# Altium PCB NeuroMother_A.PcbDoc (part 1 of 3)
Units mil, origin at the board's own origin, x right, y up, seen from the top; angles counter-clockwise.
Board outline 11995 x 18500 mil, 2 copper layers (Top Layer, Bottom Layer); 186 components, 92 nets, 510 pads, 3972 vias.
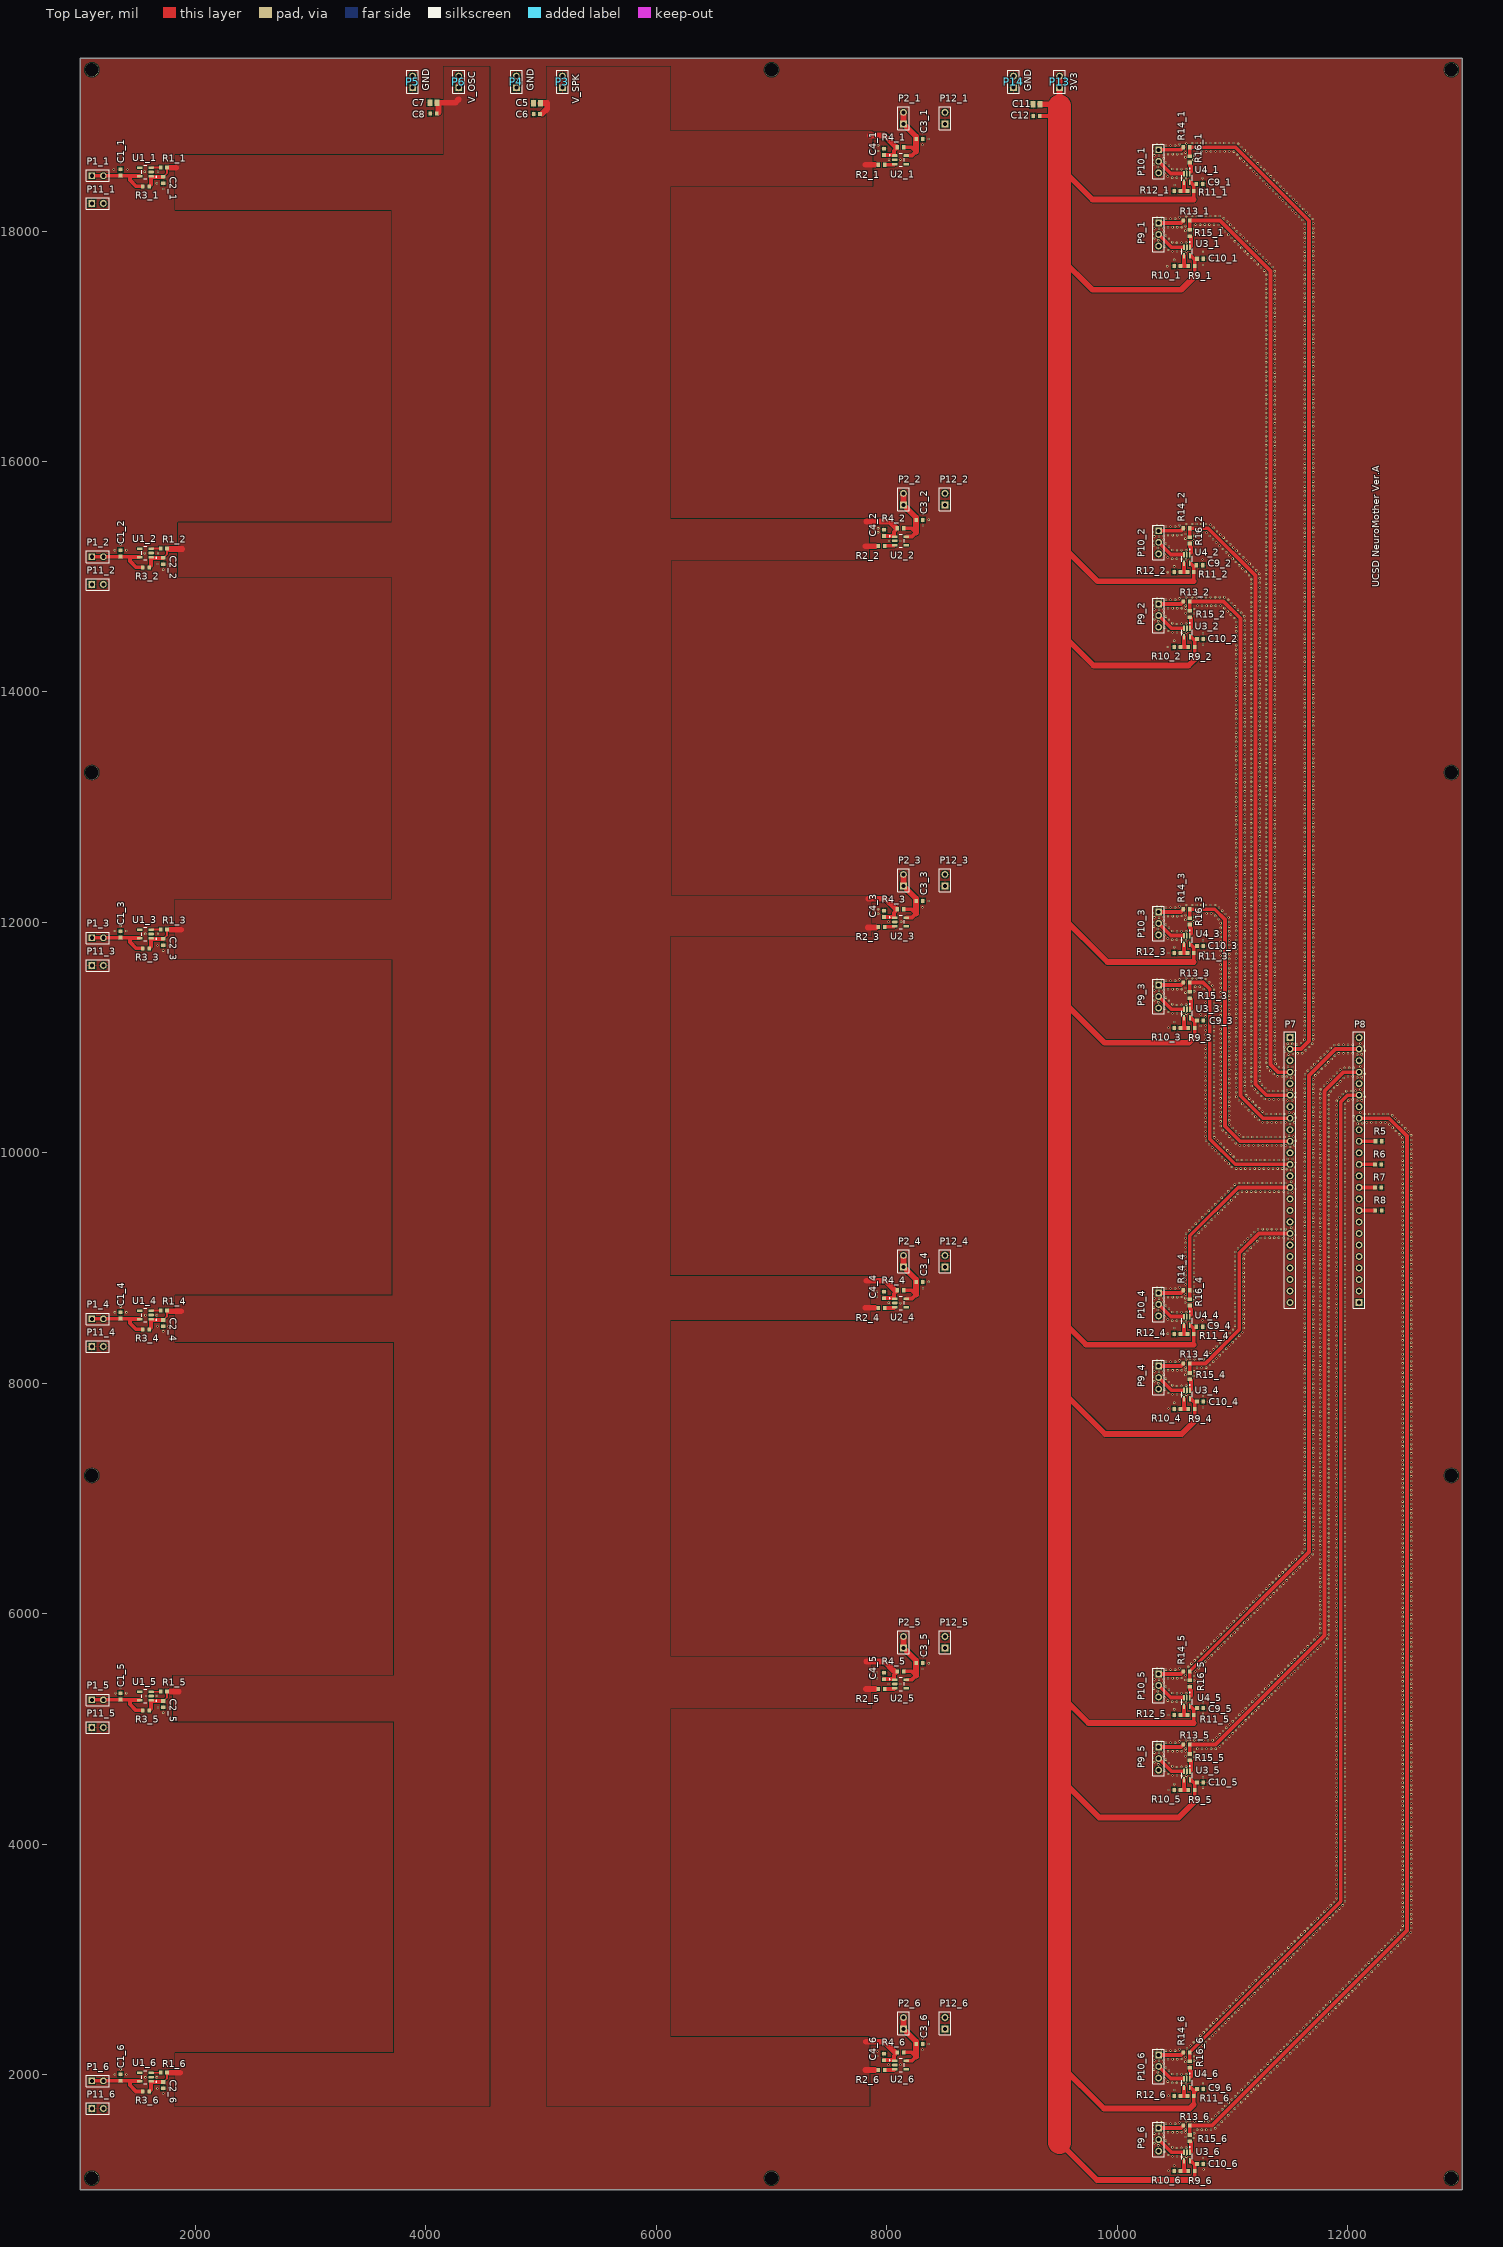
[diagram p0: Top Layer view]
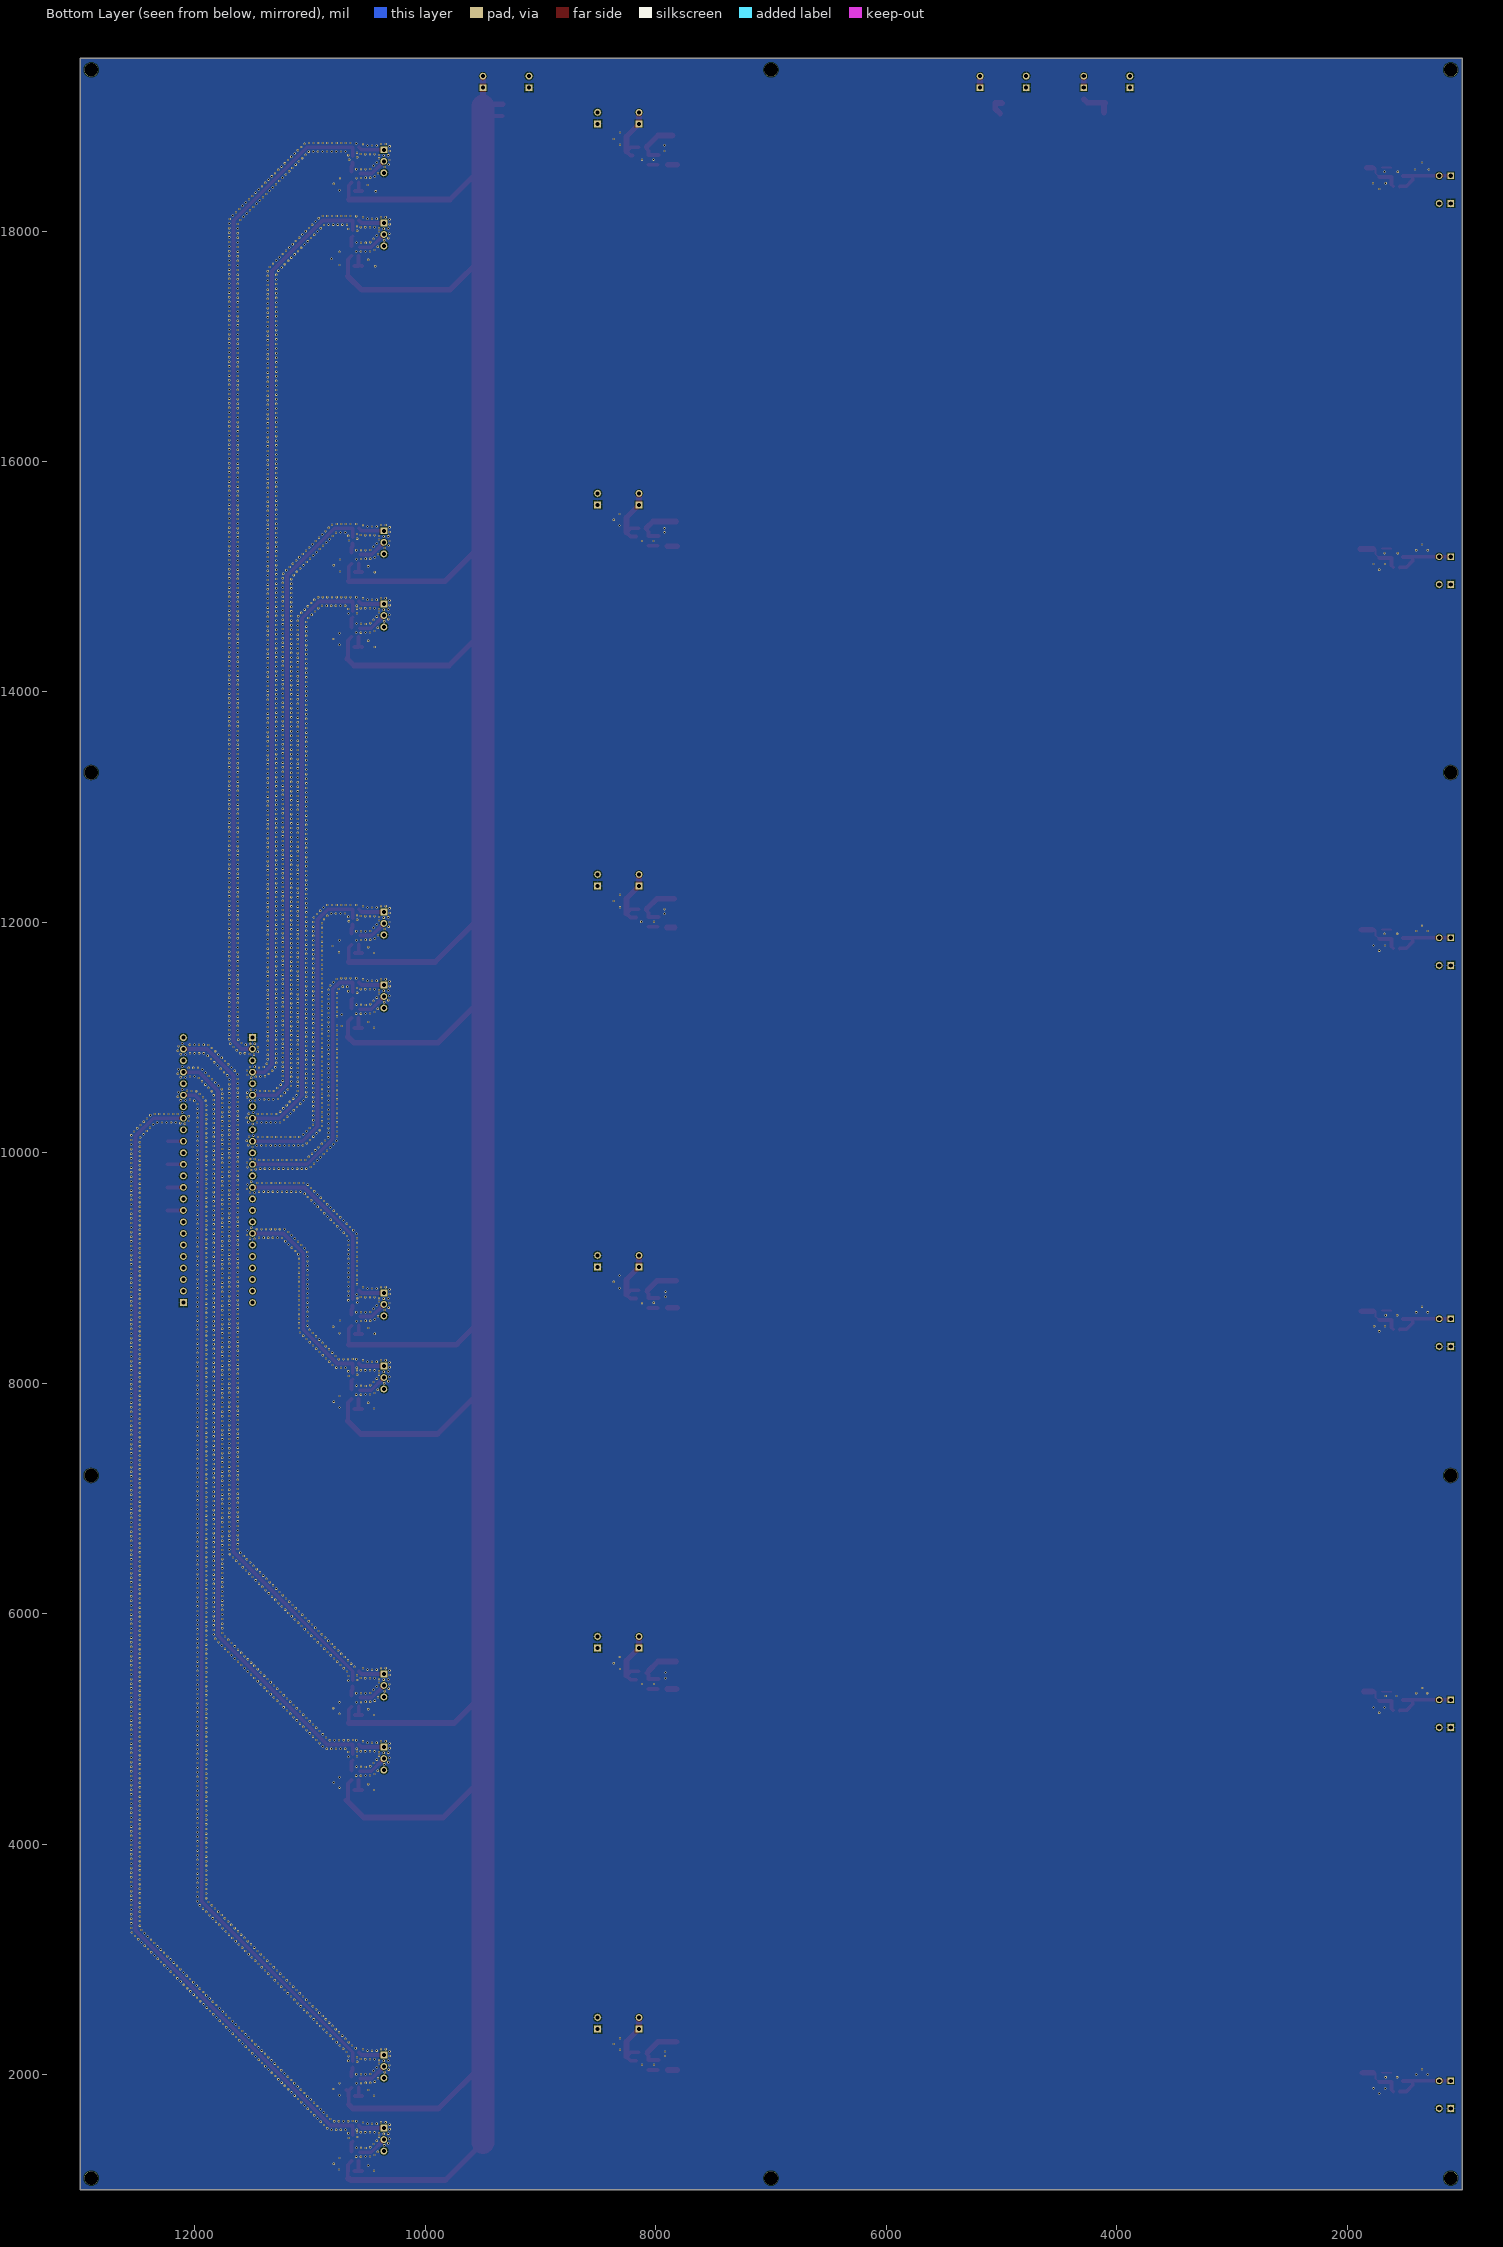
[diagram p1: Bottom Layer view, seen from below]

## Layer stack, top to bottom
Top Solder: solder mask 0.4, Solder Resist, Dk 3.5
Top Layer: signal copper 1.4
Dielectric 1: dielectric 12.6, FR-4, Dk 4.8
Bottom Layer: signal copper 1.4
Bottom Solder: solder mask 0.4, Solder Resist, Dk 3.5

## Board outline
1000,1000 12995,1000 12995,19500 1000,19500

## Design rules (kind name [scope] priority, off if disabled: settings)
BoardOutlineClearance [All] p1: gap=10 ignorepadtopadclearanceinfootprint=FALSE except(0: Arc-SplitContinuation Track-SplitContinuation SMDPad-SplitContinuation THPad-SplitContinuation Via-SplitContinuation Fill-SplitContinuation Poly-SplitContinuation Region-SplitContinuation Text-SplitContinuation)
Clearance [All] p1: gap=6 ignorepadtopadclearanceinfootprint=FALSE except(0: Arc-Hole Track-Hole SMDPad-Hole THPad-Hole Via-Hole Fill-Hole Poly-Hole Region-Hole Text-Hole)
HoleSize [All] p1: absolutevalues=TRUE maxlimit=150 minlimit=1 maxpercent=80.000 minpercent=20.000
MinimumSolderMaskSliver [All] p1: minsoldermaskwidth=4
PlaneConnect [All] p1: pad.planeconnectstyle=Relief pad.reliefexpansion=20 pad.reliefentries=4 pad.reliefconductorwidth=10 pad.reliefairgap=10 via.planeconnectstyle=Direct via.reliefexpansion=20 via.reliefentries=4 via.reliefconductorwidth=10 via.reliefairgap=10
PolygonConnect [All] p1: thpad.connectstyle=Relief thpad.reliefconductorwidth=10 thpad.reliefentries=4 thpad.polygonreliefangle="90 Angle" thpad.airgapwidth=10 smdpad.connectstyle=Relief smdpad.reliefconductorwidth=10 smdpad.reliefentries=4 smdpad.polygonreliefangle="90 Angle" smdpad.airgapwidth=10 via.connectstyle=Direct via.reliefconductorwidth=10 via.reliefentries=4 via.polygonreliefangle="90 Angle" via.airgapwidth=10
RoomDefinition U_daughter6 [InComponentClass('U_daughter6')] p1: confinementstyle=ConfineIn formatcopy=TRUE lockcomponents=FALSE outline 1035,1125 10870,1125 10870,2560 1035,2560
RoomDefinition U_daughter3 [InComponentClass('U_daughter3')] p2: confinementstyle=ConfineIn formatcopy=TRUE lockcomponents=FALSE outline 1035,11046.3 10870,11046.3 10870,12481.3 1035,12481.3
RoomDefinition U_daughter5 [InComponentClass('U_daughter5')] p3: confinementstyle=ConfineIn formatcopy=TRUE lockcomponents=FALSE outline 1035,4432.1 10870,4432.1 10870,5867.1 1035,5867.1
RoomDefinition U_daughter4 [InComponentClass('U_daughter4')] p4: confinementstyle=ConfineIn formatcopy=TRUE lockcomponents=FALSE outline 1035,7739.2 10870,7739.2 10870,9174.2 1035,9174.2
RoomDefinition U_daughter2 [InComponentClass('U_daughter2')] p5: confinementstyle=ConfineIn formatcopy=TRUE lockcomponents=FALSE outline 1035,14353.4 10870,14353.4 10870,15788.4 1035,15788.4
RoomDefinition U_daughter1 [InComponentClass('U_daughter1')] p6: confinementstyle=ConfineIn formatcopy=TRUE lockcomponents=FALSE outline 1035,17660.5 10870,17660.5 10870,19095.5 1035,19095.5
RoutingVias [All] p1: holewidth=10 width=20 viastyle="Through Hole" minholewidth=6 minwidth=12 maxholewidth=28 maxwidth=50
SilkToSilkClearance [All] p1: silktosilkclearance=4
SilkToSolderMaskClearance [IsPad] p1: minsilkscreentomaskgap=4 clearancetoexposedcopper=TRUE
SolderMaskExpansion [All] p1: expansion=4 istentingtop=FALSE
Width [All] p1: maxlimit=200 minlimit=6 preferedwidth=33
25 further rules are at their usual default settings.

## Classes and differential pairs
channel class daughter: U_daughter1 U_daughter2 U_daughter3 U_daughter4 U_daughter5 U_daughter6
component class U_daughter6: C1_6 C2_6 C3_6 C4_6 C9_6 C10_6 P1_6 P2_6 P9_6 P10_6 P11_6 P12_6 R1_6 R2_6 R3_6 R4_6 R9_6 R10_6 R11_6 R12_6 R13_6 R14_6 R15_6 R16_6 U1_6 U2_6 U3_6 U4_6
component class U_daughter5: C1_5 C2_5 C3_5 C4_5 C9_5 C10_5 P1_5 P2_5 P9_5 P10_5 P11_5 P12_5 R1_5 R2_5 R3_5 R4_5 R9_5 R10_5 R11_5 R12_5 R13_5 R14_5 R15_5 R16_5 U1_5 U2_5 U3_5 U4_5
component class U_daughter4: C1_4 C2_4 C3_4 C4_4 C9_4 C10_4 P1_4 P2_4 P9_4 P10_4 P11_4 P12_4 R1_4 R2_4 R3_4 R4_4 R9_4 R10_4 R11_4 R12_4 R13_4 R14_4 R15_4 R16_4 U1_4 U2_4 U3_4 U4_4
component class U_daughter3: C1_3 C2_3 C3_3 C4_3 C9_3 C10_3 P1_3 P2_3 P9_3 P10_3 P11_3 P12_3 R1_3 R2_3 R3_3 R4_3 R9_3 R10_3 R11_3 R12_3 R13_3 R14_3 R15_3 R16_3 U1_3 U2_3 U3_3 U4_3
component class U_daughter2: C1_2 C2_2 C3_2 C4_2 C9_2 C10_2 P1_2 P2_2 P9_2 P10_2 P11_2 P12_2 R1_2 R2_2 R3_2 R4_2 R9_2 R10_2 R11_2 R12_2 R13_2 R14_2 R15_2 R16_2 U1_2 U2_2 U3_2 U4_2
component class U_daughter1: C1_1 C2_1 C3_1 C4_1 C9_1 C10_1 P1_1 P2_1 P9_1 P10_1 P11_1 P12_1 R1_1 R2_1 R3_1 R4_1 R9_1 R10_1 R11_1 R12_1 R13_1 R14_1 R15_1 R16_1 U1_1 U2_1 U3_1 U4_1

## Components (designator, comment, footprint, x,y, rotation, side; value= is the part's Value field where it differs from the comment)
C1_1 "1uF" SMD-0603 1350,18510.5 r270 top (schematic designator C1)
C1_2 "1uF" SMD-0603 1350,15203.4 r270 top (schematic designator C1)
C1_3 "1uF" SMD-0603 1350,11896.3 r270 top (schematic designator C1)
C1_4 "1uF" SMD-0603 1350,8589.2 r270 top (schematic designator C1)
C1_5 "1uF" SMD-0603 1350,5282.1 r270 top (schematic designator C1)
C1_6 "1uF" SMD-0603 1350,1975 r270 top (schematic designator C1)
C2_1 "1uF" SMD-0603 1720,18443.06 r90 top (schematic designator C2)
C2_2 "1uF" SMD-0603 1720,15135.96 r90 top (schematic designator C2)
C2_3 "1uF" SMD-0603 1720,11828.86 r90 top (schematic designator C2)
C2_4 "1uF" SMD-0603 1720,8521.76 r90 top (schematic designator C2)
C2_5 "1uF" SMD-0603 1720,5214.66 r90 top (schematic designator C2)
C2_6 "1uF" SMD-0603 1720,1907.56 r90 top (schematic designator C2)
C3_1 "1uF" SMD-0603 8285,18800.5 r180 top (schematic designator C3)
C3_2 "1uF" SMD-0603 8285,15493.4 r180 top (schematic designator C3)
C3_3 "1uF" SMD-0603 8285,12186.3 r180 top (schematic designator C3)
C3_4 "1uF" SMD-0603 8285,8879.2 r180 top (schematic designator C3)
C3_5 "1uF" SMD-0603 8285,5572.1 r180 top (schematic designator C3)
C3_6 "1uF" SMD-0603 8285,2265 r180 top (schematic designator C3)
C4_1 "1uF" SMD-0603 7975,18688.06 r270 top (schematic designator C4)
C4_2 "1uF" SMD-0603 7975,15380.96 r270 top (schematic designator C4)
C4_3 "1uF" SMD-0603 7975,12073.86 r270 top (schematic designator C4)
C4_4 "1uF" SMD-0603 7975,8766.76 r270 top (schematic designator C4)
C4_5 "1uF" SMD-0603 7975,5459.66 r270 top (schematic designator C4)
C4_6 "1uF" SMD-0603 7975,2152.56 r270 top (schematic designator C4)
C5 "1uF" SMD-0805 4965,19110 r0 top
C6 "0.1uF" SMD-0603 4962.44,19015 r0 top
C7 "1uF" SMD-0805 4065.47,19115 r0 top
C8 "0.1uF" SMD-0603 4065,19020 r0 top
C9_1 "1uF" SMD-0603 10715,18410 r180 top (schematic designator C9)
C9_2 "1uF" SMD-0603 10715,15100 r180 top (schematic designator C9)
C9_3 "1uF" SMD-0603 10720,11150 r180 top (schematic designator C9)
C9_4 "1uF" SMD-0603 10715,8490 r180 top (schematic designator C9)
C9_5 "1uF" SMD-0603 10720,5180 r180 top (schematic designator C9)
C9_6 "1uF" SMD-0603 10720,1875 r180 top (schematic designator C9)
C10_1 "1uF" SMD-0603 10720,17760 r180 top (schematic designator C10)
C10_2 "1uF" SMD-0603 10720,14460 r180 top (schematic designator C10)
C10_3 "1uF" SMD-0603 10720,11795 r180 top (schematic designator C10)
C10_4 "1uF" SMD-0603 10720,7840 r180 top (schematic designator C10)
C10_5 "1uF" SMD-0603 10720,4535 r180 top (schematic designator C10)
C10_6 "1uF" SMD-0603 10720,1225 r180 top (schematic designator C10)
C11 "1uF" SMD-0805 9299.53,19100 r0 top
C12 "0.1uF" SMD-0603 9300,19000 r0 top
P1_1 "Header 2" HDR1X2 1100,18480.5 r0 top (schematic designator P1)
P1_2 "Header 2" HDR1X2 1100,15173.4 r0 top (schematic designator P1)
P1_3 "Header 2" HDR1X2 1100,11866.3 r0 top (schematic designator P1)
P1_4 "Header 2" HDR1X2 1100,8559.2 r0 top (schematic designator P1)
P1_5 "Header 2" HDR1X2 1100,5252.1 r0 top (schematic designator P1)
P1_6 "Header 2" HDR1X2 1100,1945 r0 top locked (schematic designator P1)
P2_1 "Header 2" HDR1X2 8145,18930.5 r90 top (schematic designator P2)
P2_2 "Header 2" HDR1X2 8145,15623.4 r90 top (schematic designator P2)
P2_3 "Header 2" HDR1X2 8145,12316.3 r90 top (schematic designator P2)
P2_4 "Header 2" HDR1X2 8145,9009.2 r90 top (schematic designator P2)
P2_5 "Header 2" HDR1X2 8145,5702.1 r90 top (schematic designator P2)
P2_6 "Header 2" HDR1X2 8145,2395 r90 top locked (schematic designator P2)
P3 "Header 2" HDR1X2 5185,19245 r90 top
P4 "Header 2" HDR1X2 4785,19245 r90 top
P5 "Header 2" HDR1X2 3885,19245 r90 top
P6 "Header 2" HDR1X2 4285,19245 r90 top
P7 "Header 24" HDR1X24 11500,11000 r270 top
P8 "Header 24" HDR1X24 12100,8700 r90 top
P9_1 "Header 3" HDR1X3 10360,18070.5 r270 top (schematic designator P9)
P9_2 "Header 3" HDR1X3 10360,14763.4 r270 top (schematic designator P9)
P9_3 "Header 3" HDR1X3 10360,11456.3 r270 top (schematic designator P9)
P9_4 "Header 3" HDR1X3 10360,8149.2 r270 top (schematic designator P9)
P9_5 "Header 3" HDR1X3 10360,4842.1 r270 top (schematic designator P9)
P9_6 "Header 3" HDR1X3 10360,1535 r270 top locked (schematic designator P9)
P10_1 "Header 3" HDR1X3 10360,18705.5 r270 top (schematic designator P10)
P10_2 "Header 3" HDR1X3 10360,15398.4 r270 top (schematic designator P10)
P10_3 "Header 3" HDR1X3 10360,12091.3 r270 top (schematic designator P10)
P10_4 "Header 3" HDR1X3 10360,8784.2 r270 top (schematic designator P10)
P10_5 "Header 3" HDR1X3 10360,5477.1 r270 top (schematic designator P10)
P10_6 "Header 3" HDR1X3 10360,2170 r270 top locked (schematic designator P10)
P11_1 "Header 2" HDR1X2 1100,18240.5 r0 top (schematic designator P11)
P11_2 "Header 2" HDR1X2 1100,14933.4 r0 top (schematic designator P11)
P11_3 "Header 2" HDR1X2 1100,11626.3 r0 top (schematic designator P11)
P11_4 "Header 2" HDR1X2 1100,8319.2 r0 top (schematic designator P11)
P11_5 "Header 2" HDR1X2 1100,5012.1 r0 top (schematic designator P11)
P11_6 "Header 2" HDR1X2 1100,1705 r0 top locked (schematic designator P11)
P12_1 "Header 2" HDR1X2 8505,18930.5 r90 top (schematic designator P12)
P12_2 "Header 2" HDR1X2 8505,15623.4 r90 top (schematic designator P12)
P12_3 "Header 2" HDR1X2 8505,12316.3 r90 top (schematic designator P12)
P12_4 "Header 2" HDR1X2 8505,9009.2 r90 top (schematic designator P12)
P12_5 "Header 2" HDR1X2 8505,5702.1 r90 top (schematic designator P12)
P12_6 "Header 2" HDR1X2 8505,2395 r90 top locked (schematic designator P12)
P13 "Header 2" HDR1X2 9500,19245 r90 top
P14 "Header 2" HDR1X2 9100,19245 r90 top
R1_1 "100" SMD-0603 1725,18553.06 r180 top (schematic designator R1)
R1_2 "100" SMD-0603 1725,15245.96 r180 top (schematic designator R1)
R1_3 "100" SMD-0603 1725,11938.86 r180 top (schematic designator R1)
R1_4 "100" SMD-0603 1725,8631.76 r180 top (schematic designator R1)
R1_5 "100" SMD-0603 1725,5324.66 r180 top (schematic designator R1)
R1_6 "100" SMD-0603 1725,2017.56 r180 top (schematic designator R1)
R2_1 "100" SMD-0603 7955,18575.5 r0 top (schematic designator R2)
R2_2 "100" SMD-0603 7955,15268.4 r0 top (schematic designator R2)
R2_3 "100" SMD-0603 7955,11961.3 r0 top (schematic designator R2)
R2_4 "100" SMD-0603 7955,8654.2 r0 top (schematic designator R2)
R2_5 "100" SMD-0603 7955,5347.1 r0 top (schematic designator R2)
R2_6 "100" SMD-0603 7955,2040 r0 top (schematic designator R2)
R3_1 "0_DNI" SMD-0603 1570,18388.06 r180 top (schematic designator R3)
R3_2 "0_DNI" SMD-0603 1570,15080.96 r180 top (schematic designator R3)
R3_3 "0_DNI" SMD-0603 1570,11773.86 r180 top (schematic designator R3)
R3_4 "0_DNI" SMD-0603 1570,8466.76 r180 top (schematic designator R3)
R3_5 "0_DNI" SMD-0603 1570,5159.66 r180 top (schematic designator R3)
R3_6 "0_DNI" SMD-0603 1570,1852.56 r180 top (schematic designator R3)
R4_1 "0_DNI" SMD-0603 8120,18728.06 r0 top (schematic designator R4)
R4_2 "0_DNI" SMD-0603 8120,15420.96 r0 top (schematic designator R4)
R4_3 "0_DNI" SMD-0603 8120,12113.86 r0 top (schematic designator R4)
R4_4 "0_DNI" SMD-0603 8120,8806.76 r0 top (schematic designator R4)
R4_5 "0_DNI" SMD-0603 8120,5499.66 r0 top (schematic designator R4)
R4_6 "0_DNI" SMD-0603 8120,2192.56 r0 top (schematic designator R4)
R5 "0" SMD-0603 12270,10100 r0 top
R6 "0" SMD-0603 12265,9900 r0 top
R7 "0" SMD-0603 12265,9700 r0 top
R8 "0" SMD-0603 12267.56,9500 r0 top
R9_1 "1M" SMD-0603 10645,17698.06 r0 top (schematic designator R9)
R9_2 "1M" SMD-0603 10645,14390.96 r0 top (schematic designator R9)
R9_3 "1M" SMD-0603 10645,11083.86 r0 top (schematic designator R9)
R9_4 "1M" SMD-0603 10645,7776.76 r0 top (schematic designator R9)
R9_5 "1M" SMD-0603 10645,4469.66 r0 top (schematic designator R9)
R9_6 "1M" SMD-0603 10645,1162.56 r0 top (schematic designator R9)
R10_1 "100k" SMD-0603 10522.44,17698.06 r0 top (schematic designator R10)
R10_2 "100k" SMD-0603 10522.44,14390.96 r0 top (schematic designator R10)
R10_3 "100k" SMD-0603 10522.44,11083.86 r0 top (schematic designator R10)
R10_4 "100k" SMD-0603 10522.44,7776.76 r0 top (schematic designator R10)
R10_5 "100k" SMD-0603 10522.44,4469.66 r0 top (schematic designator R10)
R10_6 "100k" SMD-0603 10522.44,1162.56 r0 top (schematic designator R10)
R11_1 "1M" SMD-0603 10637.56,18348.06 r0 top (schematic designator R11)
R11_2 "1M" SMD-0603 10637.56,15040.96 r0 top (schematic designator R11)
R11_3 "1M" SMD-0603 10637.56,11733.86 r0 top (schematic designator R11)
R11_4 "1M" SMD-0603 10637.56,8426.76 r0 top (schematic designator R11)
R11_5 "1M" SMD-0603 10637.56,5119.66 r0 top (schematic designator R11)
R11_6 "1M" SMD-0603 10637.56,1812.56 r0 top (schematic designator R11)
R12_1 "100k" SMD-0603 10522.44,18348.06 r0 top (schematic designator R12)
R12_2 "100k" SMD-0603 10522.44,15040.96 r0 top (schematic designator R12)
R12_3 "100k" SMD-0603 10522.44,11733.86 r0 top (schematic designator R12)
R12_4 "100k" SMD-0603 10522.44,8426.76 r0 top (schematic designator R12)
R12_5 "100k" SMD-0603 10522.44,5119.66 r0 top (schematic designator R12)
R12_6 "100k" SMD-0603 10522.44,1812.56 r0 top (schematic designator R12)
R13_1 "0" SMD-0603 10602.44,18093.06 r180 top (schematic designator R13)
R13_2 "0" SMD-0603 10602.44,14785.96 r180 top (schematic designator R13)
R13_3 "0" SMD-0603 10602.44,11478.86 r180 top (schematic designator R13)
R13_4 "0" SMD-0603 10602.44,8171.76 r180 top (schematic designator R13)
R13_5 "0" SMD-0603 10602.44,4864.66 r180 top (schematic designator R13)
R13_6 "0" SMD-0603 10602.44,1557.56 r180 top (schematic designator R13)
R14_1 "0" SMD-0603 10602.44,18728.06 r180 top (schematic designator R14)
R14_2 "0" SMD-0603 10602.44,15420.96 r180 top (schematic designator R14)
R14_3 "0" SMD-0603 10602.44,12113.86 r180 top (schematic designator R14)
R14_4 "0" SMD-0603 10602.44,8806.76 r180 top (schematic designator R14)
R14_5 "0" SMD-0603 10602.44,5499.66 r180 top (schematic designator R14)
R14_6 "0" SMD-0603 10602.44,2192.56 r180 top (schematic designator R14)
R15_1 "49.9" SMD-0603 10630,17983.06 r270 top (schematic designator R15)
R15_2 "49.9" SMD-0603 10630,14675.96 r270 top (schematic designator R15)
R15_3 "49.9" SMD-0603 10630,11368.86 r270 top (schematic designator R15)
R15_4 "49.9" SMD-0603 10630,8061.76 r270 top (schematic designator R15)
R15_5 "49.9" SMD-0603 10630,4754.66 r270 top (schematic designator R15)
R15_6 "49.9" SMD-0603 10630,1447.56 r270 top (schematic designator R15)
R16_1 "49.9" SMD-0603 10630,18623.06 r270 top (schematic designator R16)
R16_2 "49.9" SMD-0603 10630,15315.96 r270 top (schematic designator R16)
R16_3 "49.9" SMD-0603 10630,12008.86 r270 top (schematic designator R16)
R16_4 "49.9" SMD-0603 10630,8701.76 r270 top (schematic designator R16)
R16_5 "49.9" SMD-0603 10630,5394.66 r270 top (schematic designator R16)
R16_6 "49.9" SMD-0603 10630,2087.56 r270 top (schematic designator R16)
U1_1 "TPS7A02XXDBV" SOT95P280X145-5N 1565,18513.06 r180 top (schematic designator U1)
U1_2 "TPS7A02XXDBV" SOT95P280X145-5N 1565,15205.96 r180 top (schematic designator U1)
U1_3 "TPS7A02XXDBV" SOT95P280X145-5N 1565,11898.86 r180 top (schematic designator U1)
U1_4 "TPS7A02XXDBV" SOT95P280X145-5N 1565,8591.76 r180 top (schematic designator U1)
U1_5 "TPS7A02XXDBV" SOT95P280X145-5N 1565,5284.66 r180 top (schematic designator U1)
U1_6 "TPS7A02XXDBV" SOT95P280X145-5N 1565,1977.56 r180 top (schematic designator U1)
U2_1 "TPS7A02XXDBV" SOT95P280X145-5N 8119.41,18618.06 r0 top (schematic designator U2)
U2_2 "TPS7A02XXDBV" SOT95P280X145-5N 8119.41,15310.96 r0 top (schematic designator U2)
U2_3 "TPS7A02XXDBV" SOT95P280X145-5N 8119.41,12003.86 r0 top (schematic designator U2)
U2_4 "TPS7A02XXDBV" SOT95P280X145-5N 8119.41,8696.76 r0 top (schematic designator U2)
U2_5 "TPS7A02XXDBV" SOT95P280X145-5N 8119.41,5389.66 r0 top (schematic designator U2)
U2_6 "TPS7A02XXDBV" SOT95P280X145-5N 8119.41,2082.56 r0 top (schematic designator U2)
U3_1 "TLV7011DCKR" SOT65P210X110-5N 10605,17823.06 r270 top (schematic designator U3)
U3_2 "TLV7011DCKR" SOT65P210X110-5N 10605,14515.96 r270 top (schematic designator U3)
U3_3 "TLV7011DCKR" SOT65P210X110-5N 10605,11208.86 r270 top (schematic designator U3)
U3_4 "TLV7011DCKR" SOT65P210X110-5N 10605,7901.76 r270 top (schematic designator U3)
U3_5 "TLV7011DCKR" SOT65P210X110-5N 10605,4594.66 r270 top (schematic designator U3)
U3_6 "TLV7011DCKR" SOT65P210X110-5N 10605,1287.56 r270 top (schematic designator U3)
U4_1 "TLV7011DCKR" SOT65P210X110-5N 10604.41,18460.85 r270 top (schematic designator U4)
U4_2 "TLV7011DCKR" SOT65P210X110-5N 10604.41,15153.75 r270 top (schematic designator U4)
U4_3 "TLV7011DCKR" SOT65P210X110-5N 10604.41,11846.65 r270 top (schematic designator U4)
U4_4 "TLV7011DCKR" SOT65P210X110-5N 10604.41,8539.55 r270 top (schematic designator U4)
U4_5 "TLV7011DCKR" SOT65P210X110-5N 10604.41,5232.45 r270 top (schematic designator U4)
U4_6 "TLV7011DCKR" SOT65P210X110-5N 10604.41,1925.35 r270 top (schematic designator U4)

## Footprints (in the part's own frame and the unit in brackets; to place one, negate y for a bottom-side part, rotate by r counter-clockwise, add the part's x,y. Pads: shape width x height; smd on the part's side, far side on the other; paste and mask are expansions set on the pad)
HDR1X2 [mm] "Connector; Header; 2 Position"
  rect 1.5x1.5 hole 0.9: 1(0,0)
  round 1.5 hole 0.9: 2(2.54,0)
  silkscreen extent -1.27,-1.27 3.81,1.27
HDR1X3 [mm] "Connector; Header; 3 Position"
  rect 1.5x1.5 hole 0.9: 1(0,0)
  round 1.5 hole 0.9: 2(2.54,0) 3(5.08,0)
  silkscreen extent -1.27,-1.27 6.35,1.27
HDR1X24 [mm] "Connector; Header; 24 Position"
  rect 1.5x1.5 hole 0.9: 1(0,0)
  round 1.5 hole 0.9: 2(2.54,0) 3(5.08,0) 4(7.62,0) 5(10.16,0) 6(12.7,0) 7(15.24,0) 8(17.78,0) 9(20.32,0) 10(22.86,0) 11(25.4,0) 12(27.94,0) 13(30.48,0) 14(33.02,0) 15(35.56,0) 16(38.1,0) 17(40.64,0) 18(43.18,0) 19(45.72,0) 20(48.26,0) 21(50.8,0) 22(53.34,0) 23(55.88,0) 24(58.42,0)
  silkscreen extent -1.27,-1.27 59.69,1.27
SMD-0603 [mm] "SMD Body 1.6x0.8mm, IPC High Density"
  rect 0.8x0.9 smd: 1(-0.7,0) 2(0.7,0)
  body extent -0.87,-0.48 0.87,0.48, height 1.3
SMD-0805 [mm] "Chip Capacitor, Body 2.0x1.3mm, IPC High Density, 0805 Imperial, 2012 Metric"
  rect 1.1x1.4 smd: 1(-0.75,0) 2(0.75,0)
  body extent -1.1,-0.72 1.1,0.72, height 1.4
SOT65P210X110-5N [mm]
  rrect25% 1.19x0.4 smd mask+0.051: 1(-0.96,0.65) 2(-0.96,0) 3(-0.96,-0.65) 4(0.96,-0.65) 5(0.96,0.65)
  silkscreen extent -2.2,-1.17 0.63,1.17, body extent -1.05,-1 1.05,1, height 1.1
SOT95P280X145-5N [mm] "TPS7A02XXDBV"
  rrect50% 1.21x0.59 smd mask+0.051: 1(-1.255,0.95) 2(-1.255,0) 3(-1.255,-0.95) 4(1.255,-0.95) 5(1.255,0.95)
  silkscreen extent -2.51,-1.45 0.8,1.45

## Part data
C1_1 C1_2 C1_3 C1_4 C1_5 C1_6 C2_1 C2_2 C2_3 C2_4 C2_5 C2_6 C3_1 C3_2 C3_3 C3_4 C3_5 C3_6 C4_1 C4_2 C4_3 C4_4 C4_5 C4_6 C6 C8 C9_1 C9_2 C9_3 C9_4 C9_5 C9_6 C10_1 C10_2 C10_3 C10_4 C10_5 C10_6 C12: library part CAP0603, "Ceramic Capacitor 0603"
C5 C7 C11: library part CAP0805, "Ceramic Capacitor 0805 Imperial (2012 Metric)"
P1_1 P1_2 P1_3 P1_4 P1_5 P1_6 P2_1 P2_2 P2_3 P2_4 P2_5 P2_6 P3 P4 P5 P6 P11_1 P11_2 P11_3 P11_4 P11_5 P11_6 P12_1 P12_2 P12_3 P12_4 P12_5 P12_6 P13 P14: "Header, 2-Pin", LatestRevisionDate=17-Jul-2002, LatestRevisionNote="Re-released for DXP Platform.", Publisher="Altium Limited"
P7 P8: "Header, 24-Pin", LatestRevisionDate=17-Jul-2002, LatestRevisionNote="Re-released for DXP Platform.", Publisher="Altium Limited"
P9_1 P9_2 P9_3 P9_4 P9_5 P9_6 P10_1 P10_2 P10_3 P10_4 P10_5 P10_6: "Header, 3-Pin", LatestRevisionDate=17-Jul-2002, LatestRevisionNote="Re-released for DXP Platform.", Publisher="Altium Limited"
R1_1 R1_2 R1_3 R1_4 R1_5 R1_6 R2_1 R2_2 R2_3 R2_4 R2_5 R2_6 R3_1 R3_2 R3_3 R3_4 R3_5 R3_6 R4_1 R4_2 R4_3 R4_4 R4_5 R4_6 R5 R6 R7 R8 R9_1 R9_2 R9_3 R9_4 R9_5 R9_6 R10_1 R10_2 R10_3 R10_4 R10_5 R10_6 R11_1 R11_2 R11_3 R11_4 R11_5 R11_6 R12_1 R12_2 R12_3 R12_4 R12_5 R12_6 R13_1 R13_2 R13_3 R13_4 R13_5 R13_6 R14_1 R14_2 R14_3 R14_4 R14_5 R14_6 R15_1 R15_2 R15_3 R15_4 R15_5 R15_6 R16_1 R16_2 R16_3 R16_4 R16_5 R16_6: library part RES0603, "Resistor-0603"
U1_1 U1_2 U1_3 U1_4 U1_5 U1_6 U2_1 U2_2 U2_3 U2_4 U2_5 U2_6: "TPS7A02 Nanopower IQ, 25-nA, 200-mA, Low-Dropout Voltage Regulator With Fast / Transient Response"
U3_1 U3_2 U3_3 U3_4 U3_5 U3_6 U4_1 U4_2 U4_3 U4_4 U4_5 U4_6: "Low power, small size comparator with push-pull output", Package="SOT-SC70-5 Texas Instruments", Availability="In Stock", Check_prices=https://www.snapeda.com/parts/TLV7011DCKR/Texas+Instruments/view-part/?ref=eda, MF="Texas Instruments", MP=TLV7011DCKR, Price=None, Purchase-URL=https://pricing.snapeda.com/search/part/TLV7011DCKR/?ref=eda, SnapEDA_Link=https://www.snapeda.com/parts/TLV7011DCKR/Texas+Instruments/view-part/?ref=snap

## Free pads (board coordinates)
  round 120 hole 120 unplated: 1(1100,1100) 1(1100,7200) 1(1100,13300) 1(1100,19400) 1(7000,1100) 1(7000,19400) 1(12900,1100) 1(12900,7200) 1(12900,13300) 1(12900,19400)

## Via types
v1: diameter 20, hole 10, Top Layer to Bottom Layer, tented both sides, 3972 vias

## Nets (pads, with @x,y where several pads share a name; then routed paths per layer and width w, separated by ;. In a path a pad name is that pad's centre, name@x,y a point inside that pad or via, vN(x,y) a via of type N, cw(c..) or ccw(c..) an arc to the next point about the centre after c; other vN are vias at no path point)
1V4: C2_1.2 C2_2.2 C2_3.2 C2_4.2 C2_5.2 C2_6.2 C7.2 C8.2 P6.1 P6.2 R1_1.1 R1_2.1 R1_3.1 R1_4.1 R1_5.1 R1_6.1 R3_1.1 R3_2.1 R3_3.1 R3_4.1 R3_5.1 R3_6.1 U1_1.1 U1_2.1 U1_3.1 U1_4.1 U1_5.1 U1_6.1 | length 2644.5
  Top Layer w15: U1_6.1@1614.41,1940.16 1626.61,1940.16 U1_6.1@1631.65,1935.12 ; U1_5.1@1614.41,5247.26 1626.61,5247.26 U1_5.1@1631.65,5242.22 ; U1_4.1@1614.41,8554.36 1626.61,8554.36 U1_4.1@1631.65,8549.32 ; U1_3.1@1614.41,11861.46 1626.61,11861.46 U1_3.1@1631.65,11856.42 ; U1_2.1@1614.41,15168.56 1626.61,15168.56 U1_2.1@1631.65,15163.52 ; U1_1.1@1614.41,18475.66 1626.61,18475.66 U1_1.1@1631.65,18470.62 ; C2_6.2@1720,1935.12 1721.97,1935.12 1752.56,1965.71 R1_6.1@1752.56,2015 ; C2_5.2@1720,5242.22 1721.97,5242.22 1752.56,5272.81 R1_5.1@1752.56,5324.66 ; C2_4.2@1720,8549.32 1721.97,8549.32 1752.56,8579.91 R1_4.1@1752.56,8625 ; C2_3.2@1720,11856.42 1721.97,11856.42 1752.56,11887.01 R1_3.1@1752.56,11935 ; C2_2.2@1720,15163.52 1721.97,15163.52 1752.56,15194.11 R1_2.1@1752.56,15240 ; C2_1.2@1720,18470.62 1721.97,18470.62 1752.56,18501.21 R1_1.1@1752.56,18550
  Top Layer w33: R3_6.1@1598.31,1853.78 1614.65,1870.11 U1_6.1@1614.65,1935.27 ; R3_5.1@1598.31,5160.88 1614.65,5177.21 U1_5.1@1614.65,5242.37 ; R3_4.1@1598.31,8467.98 1614.65,8484.31 U1_4.1@1614.65,8549.47 ; R3_3.1@1598.31,11775.08 1614.65,11791.41 U1_3.1@1614.65,11856.57 ; R3_2.1@1598.31,15082.18 1614.65,15098.51 U1_2.1@1614.65,15163.67 ; R3_1.1@1598.31,18389.28 1614.65,18405.61 U1_1.1@1614.65,18470.77 ; U1_6.1@1631.65,1935.12 C2_6.2@1720,1935.12 ; U1_5.1@1631.65,5242.22 C2_5.2@1720,5242.22 ; U1_4.1@1631.65,8549.32 C2_4.2@1720,8549.32 ; U1_3.1@1631.65,11856.42 C2_3.2@1720,11856.42 ; U1_2.1@1631.65,15163.52 C2_2.2@1720,15163.52 ; U1_1.1@1631.65,18470.62 C2_1.2@1720,18470.62
  Top Layer w50: 1775,2015 1865,2015 ; 1775,8625 1875,8625 ; 1775,15240 1885,15240 ; 1780,5325 1855,5325 ; 1780,11935 1875,11935 ; 1780,18550 1830,18550 ; 4110,19030 4110,19100 4098.35,19111.65 4098.35,19115 4255.71,19115 4285,19144.29 ; P6.1@4285,19245 P6.2@4285,19345
3V3: C9_1.2 C9_2.2 C9_3.2 C9_4.2 C9_5.2 C9_6.2 C10_1.2 C10_2.2 C10_3.2 C10_4.2 C10_5.2 C10_6.2 C11.2 C12.2 P13.1 P13.2 R9_1.2 R9_2.2 R9_3.2 R9_4.2 R9_5.2 R9_6.2 R11_1.2 R11_2.2 R11_3.2 R11_4.2 R11_5.2 R11_6.2 U3_1.5 U3_2.5 U3_3.5 U3_4.5 U3_5.5 U3_6.5 U4_1.5 U4_2.5 U4_3.5 U4_4.5 U4_5.5 U4_6.5 | length 36332
  Top Layer w33: C12.2@9327.56,19000 9415,19000 9500,19085 ; 10640,1250 10672.56,1217.44 R9_6.2@10672.56,1162.56 10673.31,1161.81 10673.31,1096.69 ; 10640,1885 10664.37,1860.63 ; 10640,4557.1 10672.56,4524.54 R9_5.2@10672.56,4469.66 10672.56,4392.44 10685,4380 ; 10640,5192.1 10664.37,5167.73 10664.37,5120.41 10665,5119.78 10665,5050 ; 10640,7864.2 10672.56,7831.64 R9_4.2@10672.56,7776.76 10672.56,7672.44 ; 10640,8499.2 10664.37,8474.83 10664.37,8427.51 R11_4.2@10665.12,8426.76 10665,8426.64 10665,8335 ; 10640,11171.3 10672.56,11138.74 R9_3.2@10672.56,11083.86 10672.56,11007.44 ; 10640,11806.3 10664.37,11781.93 10664.37,11734.61 R11_3.2@10665.12,11733.86 10665,11733.74 10665,11655 ; 10640,14478.4 10672.56,14445.84 R9_2.2@10672.56,14390.96 10672.56,14312.44 10675,14310 10675,14285 ; 10640,15113.4 10664.37,15089.03 10664.37,15041.71 R11_2.2@10665.12,15040.96 10665.12,14959.88 ; 10640,17785.5 10672.56,17752.94 R9_1.2@10672.56,17698.06 10672.56,17607.44 ; 10640,18420.5 10664.37,18396.13 10664.37,18348.81 R11_1.2@10665.12,18348.06 10665,18347.94 10665,18275 ; 10665,1740 10665.12,1740.12 R11_6.2@10665.12,1812.56 10665.87,1813.31 10665.87,1847.96 C9_6.2@10683.95,1866.05
  Top Layer w50: C11.2@9329.06,19100 9485,19100 9500,19085 P13.1@9500,19245 P13.2@9500,19345 ; 9500,1410 9825,1085 10650,1085 10661.69,1096.69 10673.31,1096.69 ; 9500,2090 9885,1705 10630,1705 10665,1740 ; 9500,4575 9845,4230 10535,4230 10685,4380 ; 9500,5300 9750,5050 10665,5050 ; 9500,7955 9895,7560 10560.12,7560 10672.56,7672.44 ; 9500,8565 9730,8335 10665,8335 ; 9500,11345 9890,10955 10620.12,10955 10672.56,11007.44 ; 9500,12070 9915,11655 10665,11655 ; 9500,14525 9795,14230 10620,14230 10675,14285 ; 9500,15290 9830.12,14959.88 10665.12,14959.88 ; 9500,17775 9785,17490 10555.12,17490 10672.56,17607.44 ; 9500,18560 9785,18275 10665,18275
  Top Layer w200: 9500,1410 9500,2090 9500,4575 9500,5300 9500,7955 9500,8565 9500,11345 9500,12070 9500,14525 9500,15290 9500,17775 9500,18560 9500,19085
5V5: C4_1.2 C4_2.2 C4_3.2 C4_4.2 C4_5.2 C4_6.2 C5.2 C6.2 P3.1 P3.2 R2_1.1 R2_2.1 R2_3.1 R2_4.1 R2_5.1 R2_6.1 R4_1.1 R4_2.1 R4_3.1 R4_4.1 R4_5.1 R4_6.1 U2_1.1 U2_2.1 U2_3.1 U2_4.1 U2_5.1 U2_6.1 | length 3315.4
  Top Layer w33: C4_6.2@7975,2125 8062.53,2125 8062.53,2162.18 R4_6.1@8082.67,2182.33 ; C4_5.2@7975,5432.1 8062.53,5432.1 8062.53,5469.28 R4_5.1@8079.12,5485.88 ; C4_4.2@7975,8739.2 8062.53,8739.2 8062.53,8776.38 R4_4.1@8083.07,8796.93 ; C4_3.2@7975,12046.3 8062.53,12046.3 8062.53,12083.48 R4_3.1@8087.02,12107.98 ; C4_2.2@7975,15353.4 8062.53,15353.4 8062.53,15390.58 R4_2.1@8088.47,15416.53 ; C4_1.2@7975,18660.5 8062.53,18660.5 8062.53,18697.68 R4_1.1@8087.42,18722.58
  Top Layer w50: C5.2@4994.53,19110 4997.09,19112.56 5052.56,19112.56 5052.56,19062.56 5010,19020 ; P3.1@5185,19245 P3.2@5185,19345 ; 7813.5,8654.2 7895,8654.2 ; 7815,2040 7895,2040 ; 7815,15265 7900,15265 ; 7815,18575 7895,18575 ; 7820,2285 7980,2285 8070,2195 ; 7820,5345 7900,5345 ; 7825,5585 7980,5585 8060,5505 ; 7825,8890 7990,8890 8070,8810 ; 7825,15480 8025,15480 8075,15430 ; 7835,11955 7905,11955 ; 7840,12205 7990,12205 8075,12120 ; 7855,18830 7980,18830 8075,18735
GND: C1_1.1 C1_2.1 C1_3.1 C1_4.1 C1_5.1 C1_6.1 C2_1.1 C2_2.1 C2_3.1 C2_4.1 C2_5.1 C2_6.1 C3_1.1 C3_2.1 C3_3.1 C3_4.1 C3_5.1 C3_6.1 C4_1.1 C4_2.1 C4_3.1 C4_4.1 C4_5.1 C4_6.1 C5.1 C6.1 C7.1 C8.1 C9_1.1 C9_2.1 C9_3.1 C9_4.1 C9_5.1 C9_6.1 C10_1.1 C10_2.1 C10_3.1 C10_4.1 C10_5.1 C10_6.1 C11.1 C12.1 P4.1 P4.2 P5.1 P5.2 P7.1 P7.3 P7.5 P7.7 P7.9 P7.11 P7.13 P7.17 P7.19 P8.1 P8.10 P8.12 P8.14 P8.16 P8.18 P8.20 P8.22 P8.24 P9_1.3 P9_2.3 P9_3.3 P9_4.3 P9_5.3 P9_6.3 P10_1.3 P10_2.3 P10_3.3 P10_4.3 P10_5.3 P10_6.3 P11_1.1 P11_1.2 P11_2.1 P11_2.2 P11_3.1 P11_3.2 P11_4.1 P11_4.2 P11_5.1 P11_5.2 P11_6.1 P11_6.2 P12_1.1 P12_1.2 P12_2.1 P12_2.2 P12_3.1 P12_3.2 P12_4.1 P12_4.2 P12_5.1 P12_5.2 P12_6.1 P12_6.2 P14.1 P14.2 R5.2 R6.2 R7.2 R8.2 R10_1.1 R10_2.1 R10_3.1 R10_4.1 R10_5.1 R10_6.1 R12_1.1 R12_2.1 R12_3.1 R12_4.1 R12_5.1 R12_6.1 U1_1.2 U1_2.2 U1_3.2 U1_4.2 U1_5.2 U1_6.2 U2_1.2 U2_2.2 U2_3.2 U2_4.2 U2_5.2 U2_6.2 U3_1.2 U3_2.2 U3_3.2 U3_4.2 U3_5.2 U3_6.2 U4_1.2 U4_2.2 U4_3.2 U4_4.2 U4_5.2 U4_6.2